# Altium PCB JWB-001_Main.PcbDoc (part 2 of 2)
Units mil, origin at the board's own origin, x right, y up, seen from the top; angles counter-clockwise.
Board outline 814.38 x 826.67 mil, 4 copper layers (Top, Layer 2, Layer 3, Bottom), stack 29.66 mil thick; 83 components, 64 nets, 320 pads, 178 vias.
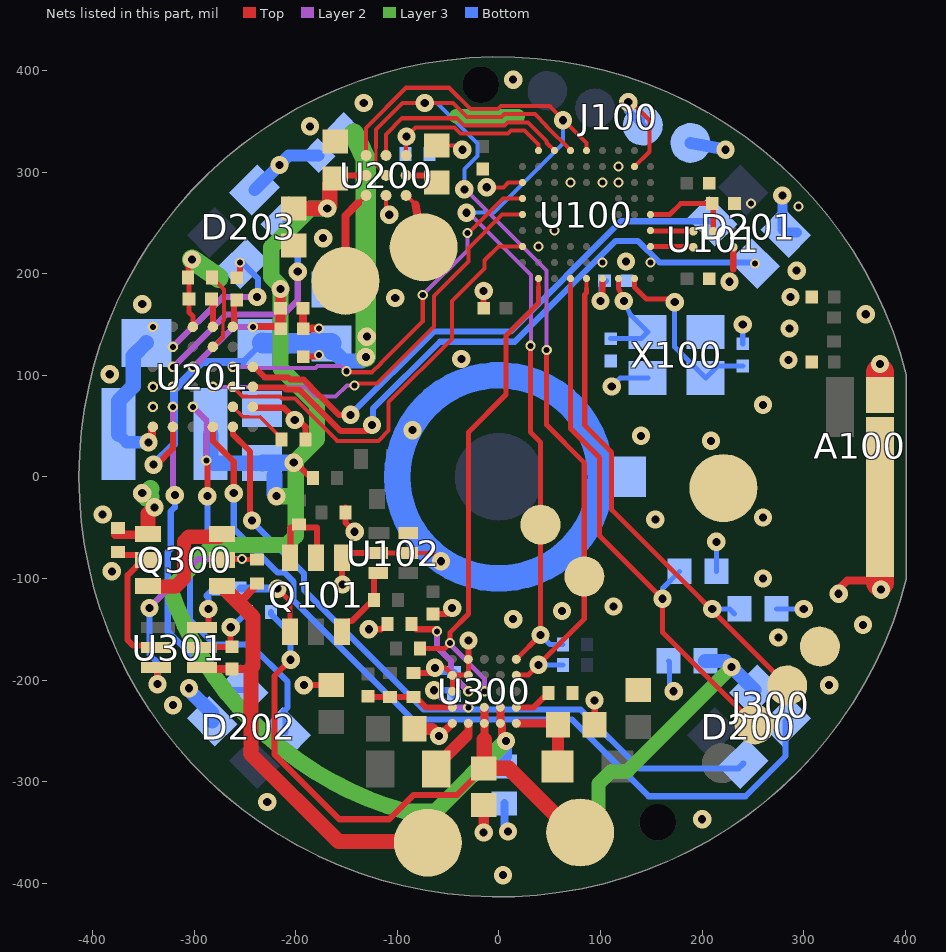
[diagram p4: the nets of this part, all layers, seen from the top]

## Via types
v1: diameter 18, hole 8, Top to Bottom, 126 vias
v2: diameter 10, hole 6, Top to Layer 2, 51 vias
v3: diameter 28, hole 16, Top to Bottom, 1 vias

## Nets (pads, with @x,y where several pads share a name; then routed paths per layer and width w, separated by ;. In a path a pad name is that pad's centre, name@x,y a point inside that pad or via, vN(x,y) a via of type N, cw(c..) or ccw(c..) an arc to the next point about the centre after c; other vN are vias at no path point) (continued)
GND: A100.2 A100.3 C100.2 C101.2 C102.2 C104.2 C105.2 C107.2 C108.2 C109.2 C110.2 C111.2 C112.2 C200.2 C201.2 C204.2 C205.2 C206.2 C207.2 C208.2 C209.2 C210.2 C211.2 C213.2 C214.1 C300.2 C301.2 C302.2 C304.2 C305.2 D301.2 D303.2 D304.2 J100.4 J300.4 Q101.1 Q101.4 Q300.1 R105.1 R200.1 R201.1 R202.1 R300.1 R301.1 R304.1 R307.1 R311.1 RT300.2 SW100.2 TP_GND.1 U100.B1 U100.B4 U100.C8 U100.D7 U100.G3 U100.G4 U100.G6 U100.G9 U100.H3 U101.B1 U102.2 U102.5 U102.6 U200.B3 U201.A5 U201.D1 U201.E4 U201.F1 U201.F4 U201.F5 U300.A2 U300.B1 U300.B2 U300.C1 U300.E1 X100.2 X100.4 | length 1391.4
  Top w4: U200.B3@-111.07,277.06 -111.07,261.07 v1(-108,258) ; U102.5@-89.24,-75 -65,-75 v1(-57,-83) ; C210.2@-61,326.11 -37.11,326.11 -36,325 v1(-36,322) ; v1(-12,285) 4.5,285 9.19,289.68 U100.G9@23.19,289.68
  Top w5: v1(-302,214) -305.81,210.19 R201.1@-305.81,196 -305.02,195.21 C214.1@-305.02,175 -305.02,162.02 -301.18,158.18 U201.D1@-301.18,147.64 -300.36,147.64 U201.D1@-300.12,147.88 ; v1(-218,-110) -205.59,-122.41 Q101.4@-205.59,-152.42 ; U102.2@-118.76,-75 U102.5@-89.24,-75 ; v1@-64,-188 v1(-63,-188) -52.92,-188 U300.B1@-45.87,-195.05 ; U300.C1@-45.87,-211.05 U300.B1@-45.87,-195.05 ; U300.A2@-30.12,-179.05 -30.12,-195.05 U300.B1@-45.87,-195.05 ; v1@123.93,210.95 v1@128.17,215.19 ; U100.B1@148.94,210.95 v2(149.17,210.95)
  Top w6: C213.2@-255,196.02 v2(-255,211) ; U201.A5@-241.06,69.09 -239.98,68 -212,68 -201,57 v1(-201,56) -197,56 -190,49 -190.19,48.81 R202.1@-190.19,37 ; C211.2@-192.64,118.3 -178.3,118.3 -177,119.6 v2(-177,120) ; v1(-192,-205) -168,-205 -164,-201 -164,-205.89 C305.2@-165,-206.89 ; v1(-154,-106) -154.41,-105.59 Q101.1@-154.41,-79.58 -149.82,-75 U102.2@-118.76,-75 ; R105.1@-151,-30 -151,-45 v1(-142,-54) ; v1(-128,-150) -116,-150 -111,-145 RT300.2@-109,-145 ; R304.1@-77.36,-192.91 -68.91,-192.91 v1@-64,-188 ; C112.2@-65,-135.02 -52.02,-135.02 v1(-46,-129) ; U300.A2@-30.12,-179.05 -30.12,-161.12 v1(-30,-161) ; C104.2@-16,165 C104.2@-15.02,166 -15,189.05 -18.05,186 v1(-15,183) ; v1(94,-220) 94.29,-220.29 C301.2@94.29,-244.09 ; U101.B1@230.63,226.06 230.63,204.25 230.94,203.94
  Top w8: -378,-56.98 -346.2,-56.98 Q300.1@-345.42,-56.2 ; C207.2@-192.98,166 -192.98,146.2 C206.2@-192.64,145.86 -192.5,146 v2(-177,146) ; v1(-59,-255) -58.32,-255 U300.E1@-45.87,-242.55 ; v1@334.65,-114.17 334.65,-115.87 331.83,-113.05 342.88,-102 367.24,-102 369.12,-103.88 v1@375.12,-103.88
  Top w10: v1(-15,-350) C300.2@-15,-323.11
  Top w12: C304.2@-82.87,-248.03 -65.97,-248.03 v1(-59,-255)
  Top w15: Q300.1@-345.42,-56.2 -345.42,-36.42 v1(-339,-30)
  Top w27.5: v1@375.12,-103.88 A100.2@375.12,-8.68 ; A100.3@375.12,80.71 v1@375.12,103
  Layer 3 w18: v1@-343,-20 -347,-20 v1(-351,-16) -347,-16 v1@-343,-12
  Layer 3 w20: v1(-302,214) -276,196
  Bottom w5: v1(111,89) 119.36,97.36 X100.2@146.46,97.36 ; C200.2@166.93,-181.1 168,-182.17 168,-207 v1(172,-211) ; v1(214,-64) 214.11,-64.11 D303.2@214.11,-93 ; C101.2@240,131.02 v1(240,150) ; D304.2@273.11,-130 v1(300,-130)
  Bottom w6: v1@-63.19,-188.19 v1(-63,-188) -58.81,-192.19 R301.1@-44,-192.19
  Bottom w8: R307.1@-254.19,-110 v1(-218,-110) ; C302.2@5.32,-321.26 5.32,-345.32 v1(9,-349)
  Bottom w12: J100.4@188.59,328.68 v1(223,322)
  other v1: 4,-392 200,-337 -228,-320 -320.69,-224.69 325,-205 275,-158 358.27,-145.67 14,-140 62,-132 112.76,-127.65 334.37,-115 376,-111 260,-100 -381,-93 154,-42 260,-40 -390,-37 208.66,35.43 139.76,40.35 -85,46 259.84,70.87 -383,101 375,111 285,115 -37,116 286,146 361,160 -351,170 -102,176 287,177 227,192 293,203 125,212.02 -173,235 -186,345 -133,368 14,391
  other v2: -340.55,68.9 -340.55,88.58 -320.87,88.58 -340.55,147.64 252,210 101.93,210.95 38.94,226.69 54.68,242.44 295,266 248,269 70.43,289.68 101.93,289.68 117.68,289.68 117.68,305.43
GREEN1: D200.3 U201.B6 | length 696.7
  Top w6: U201.B6@-261.81,49.21 -261.81,41.81 -245,25 -245,-41 v1(-243,-43) ; U201.B6@-260.75,49.21 U201.B6@-260.75,49.4
  Bottom w6: v1(-243,-43) -243,-44 -192,-95 -192,-111 -74,-229 80.37,-229 138.37,-287 235.75,-287 D200.3@240.5,-282.25
GREEN2: D201.3 U201.A3 | length 549.6
  Top w6: U201.A3@-241.06,108.46 -230.61,98 -207.56,98 -205.56,96 -192.49,96 -185,88.51 -185,88.37 -175.63,79 -175.49,79 -157.49,61 v1(-146.11,61)
  Bottom w6: v1(-146.11,61) -64.11,143 11.47,143 120.1,251.63 D201.3@209.87,251.63
GREEN3: D202.3 U201.D5 | length 396.3
  Top w6: v2(-288,16) -287,15 v1(-287,-19)
  Layer 2 w6: v2(-301.18,68.9) -288,55.72 v2(-288,16)
  Bottom w6: v1(-287,-19) -287,-70 -304,-87 -304,-141 -280,-165 -244.86,-165 -208,-201.86 -208,-227 -212,-231 -209.87,-233.13 D202.3@-209.87,-251.63
GREEN4: D203.3 U201.E2 | length 138
  Top w6: v2(-320.87,127.95) -320.68,128.14 U201.E2@-319.8,128.14
  Layer 2 w6: v2(-320.87,127.95) -271.82,177 v1(-238,177)
  Bottom w6: D203.3@-251.63,209.87 -237.17,195.41 ; v1@-237,181 -237,194.24
HAP_EN: R200.2 U100.J8 U200.A1 | length 187.1
  Top w4: U200.A1@-91.38,316.43 -91.38,335.62 -91,335.23 v1(-91,335) -82.08,343.92 -43.79,343.92 -37.88,338.01 8.91,338.01 11.79,340.88 25.28,340.88 39,327.16 39,321.24 U100.J8@38.94,321.18
  Bottom w4: R200.2@-91.81,318 -91.81,335.19 -91.62,335 v1(-91,335)
HAP_TRIG: U100.J7 U200.B1 | length 209.5
  Top w4: U200.B1@-111.07,316.43 -111.07,337.14 -95.21,353 -41.56,353 -34.57,346.01 5.6,346.01 8.47,348.88 28.59,348.88 47,330.47 47,328.87 U100.J7@54.68,321.18
NetC100_1: C100.1 U100.A4 | length 45
  Top w6: v1(100,173) 101.93,174.93 U100.A4@101.93,195.2
  Bottom w6: v1(100,173) 101,174 101,188.8 C100.1@105.12,192.91
NetC101_1: C101.1 U100.A2 X100.1 | length 188.4
  Top w5: U100.A2@133.42,195.2 133.42,186.58 145,175 166,175 173,168 v1(173,172)
  Bottom w5: v1(173,172) 173,127.91 X100.1@203.54,97.36 215.16,108.98 C101.1@240,108.98
NetC102_1: C102.1 U100.A3 X100.3 | length 101.4
  Top w5: U100.A3@117.68,195.2 117.68,186 120.92,178.08 v1(123,173)
  Bottom w5: C102.1@110,136.02 139.84,136.02 X100.3@146.46,142.64 129.09,160 v1(123,173)
NetC110_1: C110.1 U100.E1 U101.A2 | length 92.8
  Top w5: U100.E1@149.17,258.19 168.19,258.19 178.94,268.94 C110.1@209.92,268.94 210.94,267.91 U101.A2@210.94,241.81
NetC210_1: C210.1 U200.A2 | length 18.3
  Top w6: U200.A2@-88.38,296.75 C210.1@-70.07,296.75
NetC213_1: C213.1 U201.B1 | length 20.4
  Top w6: U201.B1@-260.75,147.83 C213.1@-260.75,168.28
NetC214_2: C214.2 U201.C1 | length 29.5
  Top w6: C214.2@-282.98,175 -281.5,173.52 U201.C1@-281.5,148.89 ; U201.C1@-281.5,147.64 U201.C1@-281.5,148.89 ; U201.C1@-280.43,147.83 U201.C1@-281.5,148.89
NetC301_1: C301.1 D300.C U300.E5 | length 77.9
  Top w8: U300.E5@17.63,-242.55 56.53,-242.55 C301.1@58.07,-244.09
  Top w12: C301.1@58.07,-244.09 58.07,-277.84 D300.C@60.24,-280
NetC303_2: C303.2 R304.2 R305.1 U300.D1 | length 83.3
  Top w6: C303.2@-124.61,-215.75 -123.82,-216.54 -100.98,-216.54 -82.46,-216.54 -72.2,-226.8 U300.D1@-45.87,-226.8
NetC306_1: C306.1 R303.1 U301.5 | length 72.2
  Top w6: U301.5@-295.16,-166.54 -284.8,-166.54 -284.01,-167.32 -265.67,-167.32 -264,-165.65 v1(-264,-148)
  Bottom w6: v1(-264,-148) -262.81,-148 R303.1@-247.81,-133
NetC306_2: C306.2 Q300.4 R312.1 TP_BATT-.1 U301.4 | length 475.6
  Top w6: U301.4@-302.09,-186.22 U301.4@-295.16,-186.22
  Top w8: U301.4@-295.16,-186.22 -292.2,-189.17 C306.2@-262.8,-189.17 -245.17,-189.17 -242,-186 ; -256,-123.97 -238,-105.97 R312.1@-238,-104.81
  Top w15: Q300.4@-272.58,-107.39 -256,-123.97 -242,-137.97 -242,-186 ; -244,-188 -244,-273 -158,-359 -71,-359 TP_BATT-.1@-70,-360
NetD204_A: D204.A L200.2 U201.F6 | length 151.5
  Top w8: v1(-345,34) -341.54,37.46 -341.54,47.35 U201.F6@-339.49,49.4
  Bottom w12: L200.2@-374.28,42 -366.28,34 v1(-345,34)
  Bottom w15: L200.2@-374.28,42 -374.28,74.72 -360,89 -360,119.09 D204.A@-347.09,132
NetJ100_3: J100.3 U100.H2 | length 116.3
  Top w4: v1(127.3,368.85) 130.15,368.85 148,351 148,320 U100.H2@133.42,305.43
  Bottom w4: J100.3@141.6,345.78 J100.3@141.6,353.4
  Bottom w8: v1(127.3,368.85) 127.3,360.08 J100.3@141.6,345.78
NetL300_1: L300.1 U300.E2 | length 57.9
  Top w8: -32,-254.87 -30.12,-252.99 U300.E2@-30.12,-242.55
  Top w12: L300.1@-61.61,-287.4 -61.61,-284.48 -32,-254.87
NetQ101_2: Q101.2 Q101.3 R107.1 | length 85.8
  Top w6: Q101.3@-205.59,-79.58 -205,-78.99 -205,-50 -179,-50 -179,-78.58 Q101.2@-180,-79.58
NetQ101_6: Q101.6 R106.1 U102.3 | length 76
  Top w6: Q101.6@-154.41,-152.42 -154.41,-148.41 -148,-142 -145,-142 -121.41,-118.41 -123,-116.81 -123,-99.92 U102.3@-117.76,-94.68
NetQ300_2: Q300.2 R311.2 U301.2 | length 151.1
  Top w6: R311.2@-375,-73.81 -371.81,-77 -350.21,-77 Q300.2@-345.42,-81.8 -350.59,-81.8 -365.41,-96.61 -365.41,-160.59 -360,-166 -342.58,-166 U301.2@-340.43,-168.15
NetQ300_3: Q300.3 Q300.6 | length 113.5
  Top w14: Q300.3@-343.66,-107.8 -318,-107.8 -310,-99.8 -310,-63.8 -305.2,-59 -275.38,-59 Q300.6@-272.58,-56.2
NetQ300_5: Q300.5 R312.2 U301.3 | length 249
  Top w5: Q300.5@-272.58,-81.8 -271.98,-81.19 R312.2@-238,-81.19
  Top w6: U301.3@-340.43,-187.83 -340.27,-188 -338,-188 -336,-190 v1(-336,-204) ; R312.2@-239,-80.19 R312.2@-238,-81.19
  Layer 2 w6: v1(-344,-129) -296,-81 v2(-253,-81)
  Bottom w6: v1(-344,-129) -341,-129 -344,-132 -344,-175 -336,-183 v1(-336,-204)
NetR201_2: R201.2 U201.C2 | length 77.4
  Top w3.11: -271.65,142.72 -271.65,153.54
  Top w4: R201.2@-282.19,196 -270.59,184.4 ; U201.C2@-281.5,127.95 -271.65,137.8 -271.65,142.72
  Top w4.02: -271.65,153.54 -270.67,154.53 -270.67,184.32 -270.59,184.4
NetR202_2: R202.2 U201.B5 | length 54.8
  Top w3.1: -246.14,58.9 -234.9,58.9
  Top w3.5: U201.B5@-261.81,68.9 -251.95,59.04 -246.28,59.04 ; -234.9,58.9 R202.2@-218,42
NetR300_2: R300.2 U300.D5 | length 36.9
  Top w6: U300.D5@17.63,-226.8 34.42,-226.8 R300.2@48.62,-212.6
NetR301_2: R301.2 U300.D2 | length 63.2
  Layer 2 w6: v1(-64,-210) -47.2,-226.8 v2(-30.12,-226.8)
  Bottom w6: v1(-64,-210) -49.81,-210 R301.2@-44,-215.81
NetR307_2: R307.2 U301.6 | length 59.2
  Top w6: U301.6@-302.09,-146.85 U301.6@-294.8,-146.85 ; U301.6@-295.16,-148.46 -290.46,-148.46 -286,-144 v1(-286,-130)
  Bottom w6: v1(-286,-130) -286,-119 -288,-117 -281,-110 R307.2@-277.81,-110
NetRT300_1: RT300.1 U300.C2 | length 100
  Top w6: RT300.1@-86.19,-145 -81.19,-150 -63,-150 v2(-61,-152) ; v2(-30.12,-211.05) U300.C2@-30.06,-211
  Layer 2 w6: v2(-61,-152) -61,-167.37 -56.37,-172 -47,-181.37 -47,-194 -30.12,-210.88 v2(-30.12,-211.05)
NetTP_LRA+_1: TP_LRA+.1 U200.A3 | length 55.9
  Top w4: U200.A3@-91.38,277.06 -91.06,277.06 -82,268
  Top w8: -82,268 TP_LRA+.1@-74,226
NetTP_LRA-_1: TP_LRA-.1 U200.C3 | length 92.6
  Top w4: -139,269 -138.82,269 U200.C3@-130.75,277.06
  Top w8: TP_LRA-.1@-151,193 -151,257 -139,269
NetU100_C1: U100.C1 U101.B3 | length 42.3
  Top w5: U100.C1@149.17,226.69 190.63,226.69 U101.B3@191.26,226.06
NetU100_D1: U100.D1 U101.A3 | length 42.3
  Top w5: U100.D1@149.17,242.44 149.8,241.81 U101.A3@191.26,241.81
PMIC_INT: R306.1 U100.A8 U300.C3 | length 488.1
  Top w4: 38.94,187.06 U100.A8@38.94,195.2
  Top w5: R306.1@-77.56,-169.05 -53.65,-169.05 v2(-48,-163.4) -48,-153 -30,-135 -30,44 7,81 7,139 38.94,170.94 38.94,187.06
  Layer 2 w5: v2(-48,-163.4) -46,-165.4 -46,-167 -14.37,-198.63 v2(-14.37,-211.05)
RED1: D200.4 U201.C6 | length 822.8
  Top w6: U201.C6@-281.5,49.21 -281.5,35.5 -261,15 v1(-261,-16) ; U201.C6@-280.43,49.21 U201.C6@-280.43,49.4
  Bottom w6: v1(-261,-16) -261,-51 -218,-94 -211.37,-94 -202,-103.37 -202,-122 -85,-239 72,-239 147.31,-314.31 242.69,-314.31 282.25,-274.75 D200.4@282.25,-240.49
RED2: D201.4 U201.A4 | length 607.2
  Top w6: U201.A4@-241.06,88.77 -240.29,88 -211.71,88 -209.71,86 -196.63,86 -195,84.37 -195,84.23 -179.77,69 -179.63,69 -155.63,45 -131,45 v1(-125,51)
  Bottom w6: v1(-125,51) -124,52 -124,67 -58,133 15.61,133 114.9,232.28 136.81,232.28 158.09,211 251.63,211 D201.4@251.63,209.87
RED3: D202.4 U201.E5 | length 317.5
  Layer 2 w6: v2(-320.87,68.9) -320.87,-12.17 v1@-320,-13.04
  Bottom w6: v1(-319,-18) -319,-30 -323,-34 -323,-71 -326,-74 -326,-152 -268.13,-209.87 D202.4@-251.63,-209.87
RED4: D203.4 U201.E3 | length 237.2
  Top w6: v2(-320.87,108.27) -319.99,108.27 U201.E3@-319.8,108.46
  Layer 2 w6: v2(-320.87,108.27) -319.88,108.27 -268.15,160 -212,160 -198,174 v1(-198,202)
  Bottom w6: D203.4@-209.87,251.63 -209.87,237.13 -214,233 -198,217 v1(-198,202)
SCL: R101.1 TP_SCL.1 U100.J5 U200.C1 U300.A5 | length 945.9
  Top w4: U200.C1@-130.75,316.43 -131,316.68 -131,343.31 -91.31,383 -48.93,383 -27.94,362.01 -1.03,362.01 1.96,365 50,365 86.18,328.82 U100.J5@86.18,321.18
  Top w5: U300.A5@17.63,-179.05 v1(41,-155.68) TP_SCL.1@41,-47 41,34 31,44 v2(31,129)
  Layer 2 w4: v1@-30,260 31.5,198.5 v2@31.5,129.5
  Layer 2 w5: v1(-32,260) v1@-30,260 ; v2(31,129) v2@31.5,129.5
  Bottom w4: v1(-32,260) -5,260 63,328 v1(63,351)
  Bottom w5: v1(41,-155.68) 50.32,-165 R101.1@63.19,-165
SCLK: U100.F9 U201.B3 | length 387.2
  Top w4: v2(-261.81,108.27) -261.81,109.14 -261.7,109.25 -260.83,108.38 U201.B3@-260.75,108.46 ; v2(-150,104) -149,103 -124.79,103 -116,111.79 -116,112 -75,153 v2(-75,179) ; v2(-31,240) -30,240 3.94,273.94 U100.F9@23.19,273.94
  Layer 2 w4: v2(-261.81,108.27) -247.22,108.27 -246.06,107.11 -180.49,107.11 -178.6,109 -155,109 v2(-150,104) ; v2(-75,179) -31,223 v2(-31,240)
SDA: R102.1 TP_SDA.1 U100.J6 U200.B2 U300.B5 | length 978.7
  Top w3: -120.91,324.28 -120.91,306.59 U200.B2@-111.07,296.75
  Top w4: -120.91,324.28 -120.91,342.09 -95,368 -45.24,368 -31.25,354.01 2.29,354.01 5.28,357 35.35,357 47,345.35 47,345 70.43,321.57 U100.J6@70.43,321.18
  Top w5: U300.B5@17.63,-195.05 28.95,-195.05 v1(39,-185) 84,-140 TP_SDA.1@84,-98 84,14 47,51 v2(47,125)
  Layer 2 w4: v1@-33.08,283 47,202.92 v2(47,125)
  Layer 2 w5: v1(-34,283) v1@-33.08,283
  Bottom w4: v1(-73,368) -60.79,368 -21,328.21 -21,315.79 -34,302.79 v1(-34,283)
  Bottom w5: v1(39,-185) R102.1@63.19,-185
SDI: U100.C9 U201.B4 | length 429.3
  Top w3.11: -248,79 -247.89,78.89 -238.11,78.89 -238,79 -237.37,79
  Top w4: U201.B4@-261.81,88.58 -252.23,79 -248,79 ; -237.37,79 -215.43,79 -213.43,77 -200.79,77 -159.56,35.78 -159.56,35.5 -118.58,35.5 -108.54,45.54 -108.54,73.46 -46.12,135.88 -46.12,173.09 -14,205.21 -14,213.21 -0.52,226.69 U100.C9@23.19,226.69
SDO: U100.E9 U201.C4 | length 409.3
  Top w4: v2(-281.5,88.58) -280.51,88.58 -280.43,88.66 U201.C4@-280.43,88.77 ; v2(-142,90) -140,92 -120,92 -63.84,148.16 -63.84,178.16 -30,212 -30,225 3.19,258.19 U100.E9@23.19,258.19
  Layer 2 w4: v2(-281.5,88.58) -190,88.58 -180.42,79 -160.64,79 -149.64,90 v2(-142,90)
USB_UART_RX: D304.1 J300.3 U100.A5 | length 507.7
  Top w4: 86,185.15 86,195.02 U100.A5@86.18,195.2
  Top w5: 86,185.15 86,180.92 84.5,179.42 84.5,50.5 111,24 111,-32.47 J300.3@283.79,-205.26
  Bottom w5: v1(210,-130) 226.89,-130 D304.1@231.89,-135
USB_UART_TX: D303.1 J300.2 U100.A6 | length 547.8
  Top w4: 70.43,186.57 U100.A6@70.43,195.2
  Top w5: 70.43,186.57 70.43,47.57 99,19 99,-58 v1(161,-120) 161,-152.91 J300.2@251.65,-243.56
  Bottom w5: v1(161,-120) 161,-109.89 D303.1@177.89,-93
VBATT: C300.1 R303.2 TP_BATT+.1 U300.D3 U300.E3 | length 589.3
  Top w6: v1(-205,-180) -221,-196 -221,-273 -157,-337 -108,-337 -84,-313 -41.11,-313 C300.1@-15,-286.89
  Top w8: -14.37,-258.37 U300.E3@-14.37,-242.55 U300.D3@-14.37,-226.8
  Top w15: -14.37,-258.37 -14.37,-286.26 C300.1@-15,-286.89 9.89,-286.89 73,-350 TP_BATT+.1@80,-350
  Bottom w6: R303.2@-224.19,-133 -224.19,-135 -205,-154.19 v1(-205,-180)
VLED: C200.1 C201.1 C204.1 D200.1 D201.1 D202.1 D203.1 D204.C U201.E6 | length 1091.9
  Top w6: v1(-340,12) -337,12 -320.87,28.13 U201.E6@-320.87,49.21 ; U201.E6@-319.8,49.21 U201.E6@-319.8,49.4
  Layer 3 w14: -42,355 18.72,355 ; 97,-351 98,-350 98,-302 110,-290 126,-290 v1(228.88,-187.12)
  Layer 3 w20: -143,338 -131,313 v1(-131,118)
  Bottom w6: D204.C@-251.72,113.19 D204.C@-232.91,132
  Bottom w8: v1(-340,12) -319.88,32.12 -319.88,85.63 -292.32,113.19 D204.C@-251.72,113.19
  Bottom w10: v1(279,277) 279,275.17 278,274.17 279,273.17 279,243.75 D201.1@282.25,240.49 D201.1@293.51,240.49
  Bottom w12: D203.1@-240.5,282.25 -216,306.75 v1(-216,307) -206.81,316.19 C201.1@-177.8,316.19
  Bottom w14: v1(-305,-208) -305,-210 -282.25,-232.75 D202.1@-282.25,-240.5 ; C200.1@203.15,-181.1 222.86,-181.1 v1(228.88,-187.12) D200.1@251.63,-209.87
  Bottom w15: C204.1@-165,131.43 -165,122.5 -161.5,122.5 -153,114 -135,114 v1(-131,118)
  Bottom w20: D204.C@-232.91,132 -232.34,131.43 C204.1@-165,131.43
  other v1: -130,138
VSYS: C205.1 C206.1 C207.1 C208.1 C209.1 C302.1 L200.1 R104.2 U200.C2 U201.A1 U201.D3 U300.D4 U300.E4 | length 1465
  Top w6: C206.1@-216.65,147.83 C206.1@-215.02,146.2 ; v1(-202,14) -200,14 -185,-1 R104.2@-182.81,-1 ; C209.1@-161,293.89 -158.14,296.75 U200.C2@-130.75,296.75
  Top w7: U201.A1@-241,147.83 C206.1@-216.65,147.83
  Top w8: U300.D4@1.63,-226.8 1.63,-242.55 3,-243.92 3,-256 v1(7,-260)
  Top w10: v1(-215,185) C207.1@-215.02,166 -215.02,146.2 C206.1@-214.69,145.86
  Top w15: C208.1@-201,264 -200.89,264.11 v1(-169,264.11) -166.5,266.61 -166.5,288.39 C209.1@-161,293.89
  Layer 2 w6: v2(-301.18,108.27) -300.2,108.27 -260.46,148 -260.1,147.64 v2(-242.13,147.64)
  Layer 3 w16: v1(-219,-19) -201,-19 ; v1(-169,264.11) -185.89,264.11 -224,226 -224,196.7 -215,187.7 v1(-215,185) -215,107 -179,71 -179,37 v1(-202,14) -200,12 -200,-58 -209,-67 -280.88,-67 -323.84,-109.96 ccw(c0,0) -91.16,-329.63 -62.63,-329.63 v1(7,-260)
  Bottom w12: C302.1@5.32,-285.04 7,-283.35 3,-279.35 7,-275.35 v1(7,-260)
  Bottom w15: L200.1@-283.72,42 -283.72,16.72 -280.43,13.43 C205.1@-233,13.43
  Bottom w16: C205.1@-233,13.43 -232.43,14 v1(-202,14) ; C205.1@-221,1.43 -221,-17 v1(-219,-19)
pads on no net: U100.B5 U100.B6 U100.B7 U100.B9 U100.C5 U100.C6 U100.C7 U100.D8 U100.E2 U100.E3 U100.E7 U100.E8 U100.F2 U100.F3 U100.F7 U100.F8 U100.G1 U100.G2 U100.G5 U100.G7 U100.G8 U100.H1 U100.H4 U100.H5 U100.H6 U100.H7 U100.J3 U100.J4 U201.D2 U201.D4 U201.F2 U300.A1 U300.A3 U300.A4 U300.B3 U300.B4 U300.C5 U301.1
copper on no net: | length 8120
  Top w7.87: 7121.71,-206.52 8041.71,-206.52 8041.71,-111.52 7121.71,-111.52 7121.71,-206.52
  Layer 2 w7.87: 7121.71,-326.52 8041.71,-326.52 8041.71,-231.52 7121.71,-231.52 7121.71,-326.52
  Layer 3 w7.87: 7121.71,-446.52 8041.71,-446.52 8041.71,-351.52 7121.71,-351.52 7121.71,-446.52
  Bottom w7.87: 7121.71,-561.52 8041.71,-561.52 8041.71,-466.52 7121.71,-466.52 7121.71,-561.52

## Polygon pours and split planes (outlines as drawn)
1V8 on Top "Top - 1V8" (solid, pour order 11): -111,-240 -189,-240 -194,-245 -194,-287 -161,-320 -111,-320
GND on Top "Top-GND" (solid, remove dead copper, pour order 12): 401,-100.44 cw(c0,0) 401,100.44
GND on Layer 2 "Layer 2-GND" (solid, pour order 24): 401,-100.44 cw(c0,0) 401,100.44
1V8 on Layer 3 "Layer 3-1V8" (solid, remove dead copper, pour order 27): 401,-100.44 cw(c0,0) 401,100.44
VLED on Layer 3 "Layer 3-VLED" (solid, pour order 5): 128.07,-393.05 cw(c0,0) 316.42,266.01 235.22,265.89 ccw(c0,0) 51.01,-351.32 105.38,-339
GND on Layer 3 "Layer 3- GND" (solid, remove dead copper, pour order 8): -333.26,-100.8 -329.28,-100.8 -286.79,-58.51 -214,-58.51 -192.53,-37.9 -192.53,72.89 -225.64,106 -225.64,224.64 -191.79,258.49 -147,258.49 -145.64,259.64 -145.49,314 -146.75,315.48 ccw(c-147.25,315.34) -147.47,315.8 ccw(c0,0) -333.76,-100.43 ccw(c-333.26,-100.28)
VLED on Bottom "Bottom-VLED" (solid, remove dead copper, pour order 6): -234,162 -129,162 -119,152 -119,115 -129,105 -132,105 -234,105
GND on Bottom "Top-GND" (solid, remove dead copper, pour order 14): 401,-100.44 cw(c0,0) 401,100.44

## Keep-outs
Keep-Out Layer:
  rectangle: 7121.71,-1277.52 7311.71,-1182.52
  lines w1.97: 401,-100.44 401,100.44
  lines w2: 401,-100.44 cw(c0,0) 401,100.44
  lines w7.87: 7121.71,-1277.52 8041.71,-1277.52 8041.71,-1182.52 7121.71,-1182.52 7121.71,-1277.52
  text "ROUTING KEEPOUT LAYER" at 7381.71,-1250.52 h35

## Other copper
Top:
  rectangle: 7121.71,-206.52 7311.71,-111.52
  text ".Layer_Name" at 7381.71,-179.52 h40
Layer 2:
  rectangle: 7121.71,-326.52 7311.71,-231.52
  text ".Layer_Name" at 7381.71,-299.52 h40
Layer 3:
  rectangle: 7121.71,-446.52 7311.71,-351.52
  text ".Layer_Name" at 7381.71,-419.52 h40
Bottom:
  rectangle: 7121.71,-561.52 7311.71,-466.52
  text ".Layer_Name" at 7381.71,-534.52 h40
Multi-Layer:
  rectangle: 7111.71,-1397.52 7301.71,-1302.52
  lines w7.87: 7111.71,-1397.52 8031.71,-1397.52 8031.71,-1302.52 7111.71,-1302.52 7111.71,-1397.52
  text "MULTILAYER" at 7371.71,-1370.52 h40

## Silkscreen, mask and mechanical layers (free items; w line width, h text height)
Top Overlay:
  circle w5: c-88,342 r4.24
  circle w5: c94.49,-7.87 r181.1
  rectangle: 7121.71,29.48 7311.71,124.48
  lines w5: -80,39 -93,47 -147.82,78.32 -94.09,172.34 -20,130
  lines w7.87: 7121.71,29.48 7121.71,124.48 8041.71,124.48 8041.71,29.48 7121.71,29.48
  text "+" at -59,149 h45
  text "-" at -167,106 h45
  text ".Layer_Name" at 7381.71,56.48 h40
  text "GND" at 171,-57 h40 r90
  text "-" at -156,-377 h45
  text "+" at 7,-395 h45
Bottom Overlay:
  rectangle: 7121.71,-797.52 7311.71,-702.52
  lines w7.87: 7121.71,-797.52 7121.71,-702.52 8041.71,-702.52 8041.71,-797.52 7121.71,-797.52
  text "JWB-001" at 164,225 h40
  text "MAIN" at 62,171 h40
  text "v2.0" at 70,115 h40
  text ".Layer_Name" at 7381.71,-770.52 h40
Top Paste:
  rectangle: 7121.71,147.48 7311.71,242.48
  lines w7.87: 7121.71,147.48 8041.71,147.48 8041.71,242.48 7121.71,242.48 7121.71,147.48
  text ".Layer_Name" at 7381.71,174.48 h40
Bottom Paste:
  rectangle: 7121.71,-915.52 7311.71,-820.52
  lines w7.87: 7121.71,-915.52 8041.71,-915.52 8041.71,-820.52 7121.71,-820.52 7121.71,-915.52
  text ".Layer_Name" at 7381.71,-888.52 h40
Top Solder:
  rectangle: 7121.71,-88.52 7311.71,6.48
  lines w7.87: 7121.71,-88.52 7121.71,6.48 8041.71,6.48 8041.71,-88.52 7121.71,-88.52
  text ".Layer_Name" at 7381.71,-61.52 h40
Bottom Solder:
  rectangle: 7121.71,-679.52 7311.71,-584.52
  lines w7.87: 7121.71,-679.52 8041.71,-679.52 8041.71,-584.52 7121.71,-584.52 7121.71,-679.52
  text ".Layer_Name" at 7381.71,-652.52 h40
Drill Guide:
  rectangle: 7121.71,-1033.52 7311.71,-938.52
  lines w7.87: 7121.71,-1033.52 7121.71,-938.52 8041.71,-938.52 8041.71,-1033.52 7121.71,-1033.52
  text ".Layer_Name" at 7381.71,-1006.52 h40
Board Outline:
  rectangle: 7121.71,1210 7311.71,1305
  lines w1.97: 401,-100.44 401,100.44
  lines w2: 401,-100.44 cw(c0,0) 401,100.44
  lines w7.87: 7121.71,1210 7121.71,1305 8041.71,1305 8041.71,1210 7121.71,1210
  text ".Layer_Name" at 7381.71,1237 h40
Border & Title:
  drawing of 1359 lines, arcs and shapes, not listed
  text "1" at -1148.9,5862.36 h70
  text "2" at 1601.76,5862.36 h70
  text "3" at 4346.76,5862.36 h70
  text "4" at 7097.77,5862.36 h70
  text "REVISION" at 6350,5630 h80
  text "REV" at 4940,5460 h60
  text "DESCRIPTION" at 5370,5460 h60
  text "DATE" at 7330,5460 h60
  text "BY" at 7960,5460 h60
  text ".ReleaseRev1" at 4940,5310 h50
  text ".ReleaseDesc1" at 5370,5310 h50
  text ".ReleaseBy1" at 7910,5310 h50
  text ".ReleaseDate1" at 7250,5300 h50
  text ".ReleaseRev2" at 4940,5160 h50
  text ".ReleaseDesc2" at 5370,5160 h50
  text ".ReleaseDate2" at 7250,5160 h50
  text ".ReleaseBy2" at 7910,5160 h50
  text ".ReleaseRev3" at 4940,5010 h50
  text ".ReleaseDesc3" at 5370,5010 h50
  text ".ReleaseDate3" at 7250,5010 h50
  text ".ReleaseBy3" at 7910,5010 h50
  text "A" at -2425.24,4844.36 h70
  text "A" at 8374.76,4844.36 h70
  text "B" at -2425.24,2719.36 h70
  text "B" at 8374.76,2719.36 h70
  text "LAYER USAGE" at 7171.71,1360.48 h80
  text "C" at -2425.24,594.36 h70
  text "C" at 8374.76,594.36 h70
  text "D" at -2425.24,-1525.64 h70
  text "D" at 8374.76,-1525.64 h70
  text "PROJECT:" at 5327.76,-1653.64 h50
  text "ENGINEER:" at 3811.76,-1654.64 h50
  text ".ProjectEngineer" at 4270,-1720 h70
  text ".GlobalProjectName" at 5760,-1720 h80
  text "PCB NAME:" at 5322.76,-1867.64 h50
  text "DATE:" at 3814.76,-1871.64 h50
  text "REV:" at 7421.76,-1880.64 h50
  text ".GlobalProjectRevision" at 7707.17,-1955.24 h80
  text ".GLobalReleaseDate" at 4100,-1960 h70
  text ".PCBName" at 5760,-1960 h80
  text "For" at 2870,-2020 h70
  text "DWG NO:" at 3820,-2120 h50
  text "FILE NAME:" at 5320,-2120 h50
  text "SCALE:" at 7416.76,-2127.64 h50
  text ".GlobalClientName" at 2660,-2190 h80
  text ".Pcb_File_Name_No_Path" at 5410,-2230 h60
  text "1:1" at 7759.76,-2234.64 h50
  text ".PCBDocNum" at 4080,-2240 h60
  text "1" at -1148.9,-2437.64 h70
  text "2" at 1601.76,-2437.64 h70
  text "3" at 4346.76,-2437.64 h70
  text "4" at 7097.77,-2437.64 h70
Fabrication Notes:
  drawing of 302 lines, arcs and shapes, not listed
  text "Fabrication Notes:" at -2090.2,5597.36 h70
  text "1. Fabricate to meet or exceed IPC 6011/6012 Class 2, as definied in IPC-2221" at -2142.8,5444.76 h50
  text "2. Prepreg Material: 370HR or material with TG >= 170, TD >= 340" at -2150,5325 h50
  text "3. Minimum trace width is 3mil, minimum spacing is 3mil" at -2150,5200 h50
  text "4. Board finish: Electroless Nickel, Immersion Gold (ENIG)" at -2150,5075 h50
  text "5. Flammability: Materials to meet UL94V-0 specification" at -2150,4975 h50
  text "6. Apply LPI Soldermask (Green) on both sides" at -2150,4850 h50
  text "7. Silkscreen on both sides using white epoxy ink, registration to be 10mil," at -2150,4725 h50
  text "clear silkscreen from all exposed pads" at -2000,4600 h50
  text "8. Dimensions and hole sizes are in mils" at -2150,4475 h50
  text "9. The fabricated board shall be RoHS compliant" at -2150,4350 h50
  text "4 Layer PCB 31.2mil +/- 10% Finished Thickness" at 2800,4300 h60
  text "10. All 7mil traces with 10 mil GND clearance on layer 1" at -2175,4225 h50
  text "All layer thickness and dielectric values are +/- 10% tolerance" at 2800,4200 h60
  text "to be impedance matched to 50 Ohms +/- 10%" at -2000,4120 h50
  text "Layer" at 2847.59,4029.5 h60
  text "Name" at 3257.5,4029.5 h60
  text "Material" at 4187.24,4029.5 h60
  text "Thickness" at 5047.01,4029.5 h60
  text "Constant" at 5696.85,4029.5 h60
  text "Board Layer Stack" at 6266.71,4029.5 h60
  text "11. All Partial Vias are between Layer 1(Top) and 2." at -2171,4014 h50
  text "1" at 2847.59,3909.5 h60
  text "Top Overlay" at 3257.5,3909.5 h60
  text "Partial Vias should be considered Via in Pad, to be capped and filled." at -1991,3902 h50
  text "2" at 2847.59,3789.5 h60
  text "Top Solder" at 3257.5,3789.5 h60
  text "Solder Resist" at 4187.24,3789.5 h60
  text "0.80mil" at 5047.01,3789.5 h60
  text "3.5" at 5696.85,3789.5 h60
  text "3" at 2847.59,3669.5 h60
  text "Top" at 3257.5,3669.5 h60
  text "Copper" at 4187.24,3669.5 h60
  text "1.25mil" at 5047.01,3669.5 h60
  text "4" at 2847.59,3549.5 h60
  text "Core 1" at 3257.5,3549.5 h60
  text "370HR" at 4187.24,3549.5 h60
  text "3.98mil" at 5047.01,3549.5 h60
  text "4.02" at 5696.85,3549.5 h60
  text "5" at 2847.59,3429.5 h60
  text "Layer 2" at 3257.5,3429.5 h60
  text "Copper" at 4187.24,3429.5 h60
  text "0.60mil" at 5047.01,3429.5 h60
  text "6" at 2847.59,3309.5 h60
  text "Core 2" at 3257.5,3309.5 h60
  text "370HR" at 4187.24,3309.5 h60
  text "18.00mil" at 5047.01,3309.5 h60
  text "4.3" at 5696.85,3309.5 h60
  text "7" at 2847.59,3189.5 h60
  text "Layer 3" at 3257.5,3189.5 h60
  text "Copper" at 4187.24,3189.5 h60
  text "0.60mil" at 5047.01,3189.5 h60
  text "8" at 2847.59,3069.5 h60
  text "Core 3" at 3257.5,3069.5 h60
  text "370HR" at 4187.24,3069.5 h60
  text "3.98mil" at 5047.01,3069.5 h60
  text "4.02" at 5696.85,3069.5 h60
  text "9" at 2847.59,2949.5 h60
  text "Bottom" at 3257.5,2949.5 h60
  text "Copper" at 4187.24,2949.5 h60
  text "1.25mil" at 5047.01,2949.5 h60
  text "10" at 2847.59,2829.5 h60
  text "Bottom Solder" at 3257.5,2829.5 h60
  text "Solder Resist" at 4187.24,2829.5 h60
  text "0.80mil" at 5047.01,2829.5 h60
  text "3.5" at 5696.85,2829.5 h60
  text "11" at 2847.59,2709.5 h60
  text "Bottom Overlay" at 3257.5,2709.5 h60
  text ".Layer_Name" at 7381.71,1123.48 h40
Ref Des Top:
  rectangle: 7121.71,860.48 7311.71,955.48
  lines w7.87: 7121.71,860.48 8041.71,860.48 8041.71,955.48 7121.71,955.48 7121.71,860.48
  text ".Layer_Name" at 7381.71,887.48 h40
  text "$Id: CDI_001_rigid_flex_v1.5.brd 3140 2014-06-26 15:58:28Z davisj $" at -7762.71,-3234.74 h117.8
Ref Des Bottom:
  rectangle: 7121.71,740.48 7311.71,835.48
  lines w7.87: 7121.71,740.48 8041.71,740.48 8041.71,835.48 7121.71,835.48 7121.71,740.48
  text ".Layer_Name" at 7381.71,767.48 h40
Assembly Top:
  circle w1.97: c94.49,-7.87 r181.1
  rectangle: 7121.71,624.48 7311.71,719.48
  lines w7.87: 7121.71,624.48 7121.71,719.48 8041.71,719.48 8041.71,624.48 7121.71,624.48
  text ".Layer_Name" at 7381.71,651.48 h40
Assembly Bottom:
  rectangle: 7121.71,506.48 7311.71,601.48
  lines w7.87: 7121.71,506.48 7121.71,601.48 8041.71,601.48 8041.71,506.48 7121.71,506.48
  text ".Layer_Name" at 7381.71,533.48 h40
Courtyard Top:
  rectangle: 7121.71,386.48 7311.71,481.48
  lines w7.87: 7121.71,386.48 7121.71,481.48 8041.71,481.48 8041.71,386.48 7121.71,386.48
  text ".Layer_Name" at 7381.71,413.48 h40
Coutryard Bottom:
  rectangle: 7121.71,266.48 7311.71,361.48
  lines w7.87: 7121.71,266.48 7121.71,361.48 8041.71,361.48 8041.71,266.48 7121.71,266.48
  text ".Layer_Name" at 7381.71,293.48 h40
Drill Drawing:
  rectangle: 7121.71,-1151.52 7311.71,-1056.52
  lines w1: 2848.12,1797.5 2860.62,1797.5 2873.12,1785 2885.62,1797.5 2898.12,1797.5 2885.62,1810 2898.12,1822.5 2885.62,1822.5 2873.12,1835 2860.62,1822.5 2848.12,1822.5 2860.62,1810 2848.12,1797.5
  lines w7.87: 7121.71,-1151.52 8041.71,-1151.52 8041.71,-1056.52 7121.71,-1056.52 7121.71,-1151.52
  lines w15: 2780,1740 7872.62,1740 ; 2780,1890 7872.62,1890 ; 3330.88,1590 3330.88,2040 ; 4028.69,1590 4028.69,2040 ; 5374.29,1590 5374.29,2040 ; 6108.1,1590 6108.1,2040 ; 6613.97,1590 6613.97,2040 ; 2780,1590 7872.62,1590 7872.62,2040 2780,2040 2780,1590
  text "Symbol" at 2870,1935 h72
  text "Hit Count" at 3375.88,1935 h72
  text "Finished Hole Size" at 4073.69,1935 h72
  text "Hole Type" at 5419.29,1935 h72
  text "Plated" at 6153.1,1935 h72
  text "Rout Path Length" at 6658.97,1935 h72
  text "51" at 3375.88,1785 h60
  text "6.00mil (0.152mm)" at 4073.69,1785 h60
  text "Round" at 5419.29,1785 h60
  text "PTH" at 6153.1,1785 h60
  text "51 Total" at 3375.88,1635 h60
  text ".Layer_Name" at 7381.71,-1124.52 h40

## Dimensions
401,100.44 to 411,-100 on Fabrication Notes
0,0 to 406,349 on Fabrication Notes